# Altium PCB Beacon_V1.PcbDoc
Units mm, origin at the board's own origin, x right, y up, seen from the top; angles counter-clockwise.
Board outline 90 x 66.86 mm, 2 copper layers (Top Layer, Bottom Layer); 39 components, 31 nets, 163 pads, 34 vias.
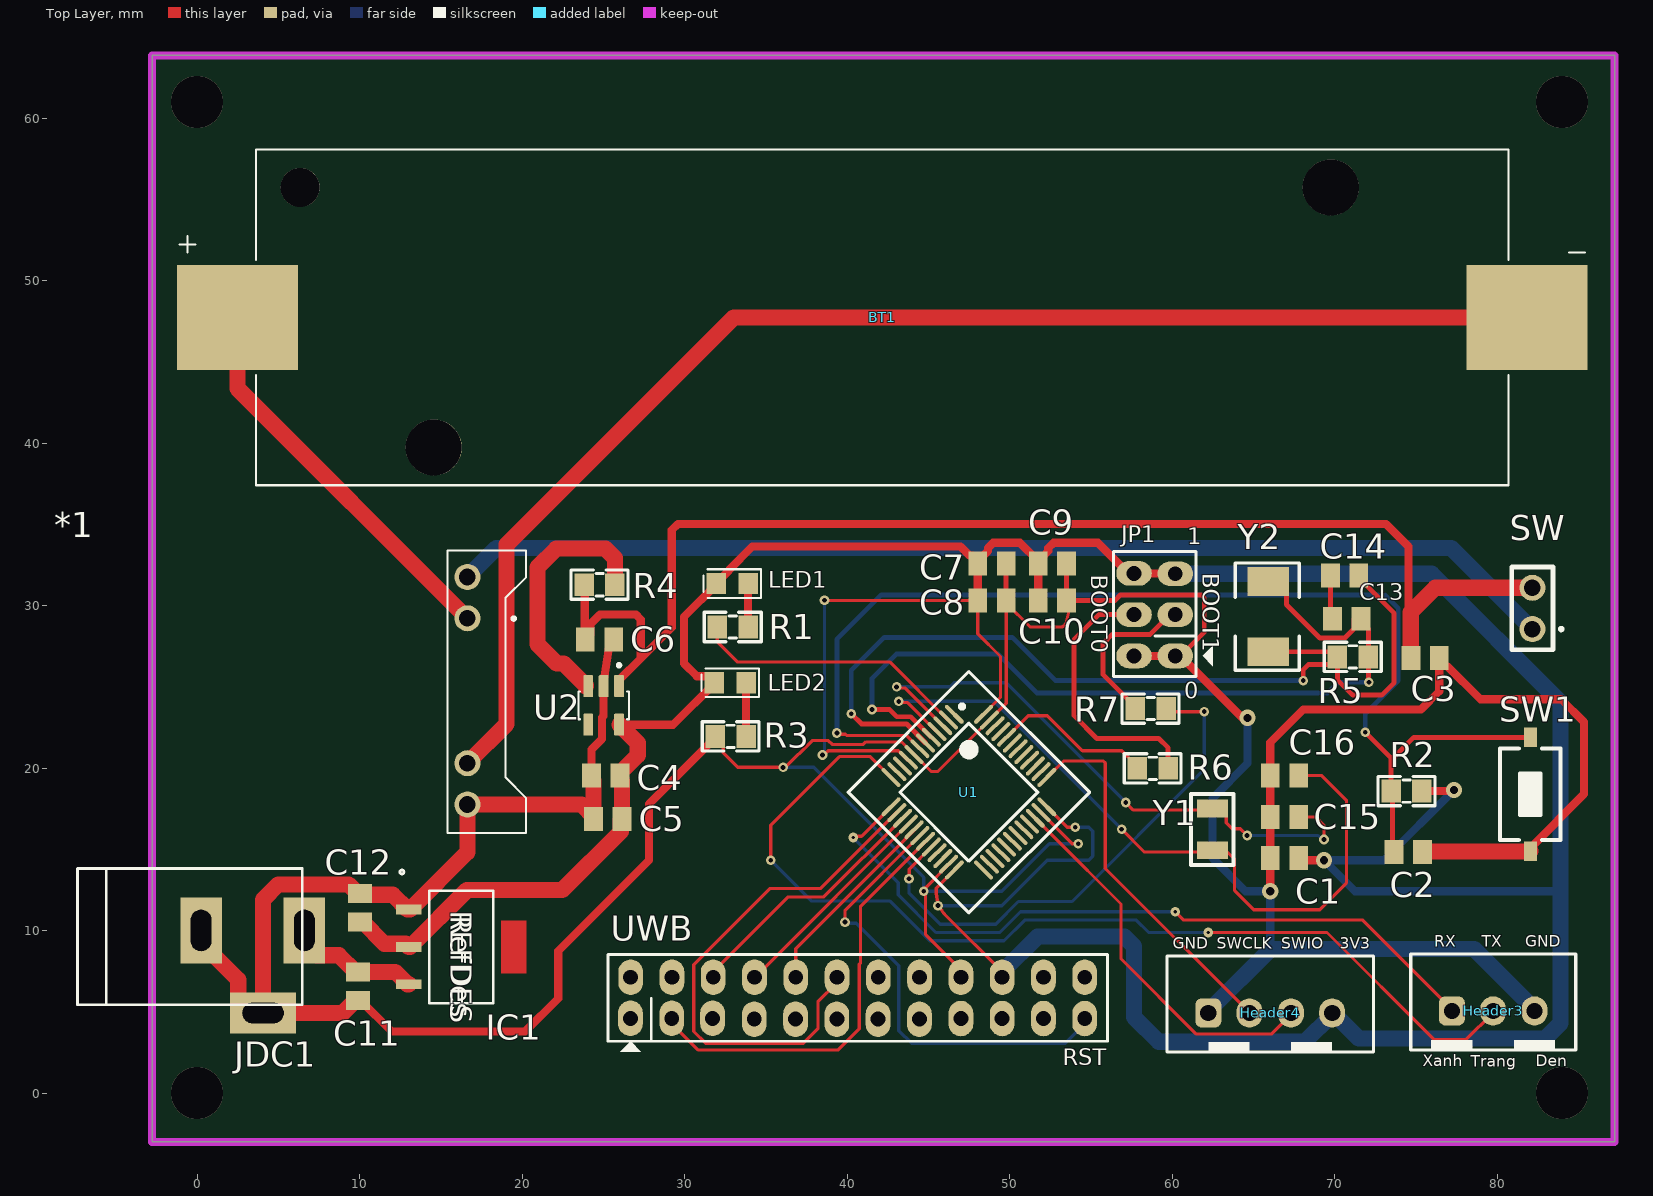
[diagram p0: Top Layer view]
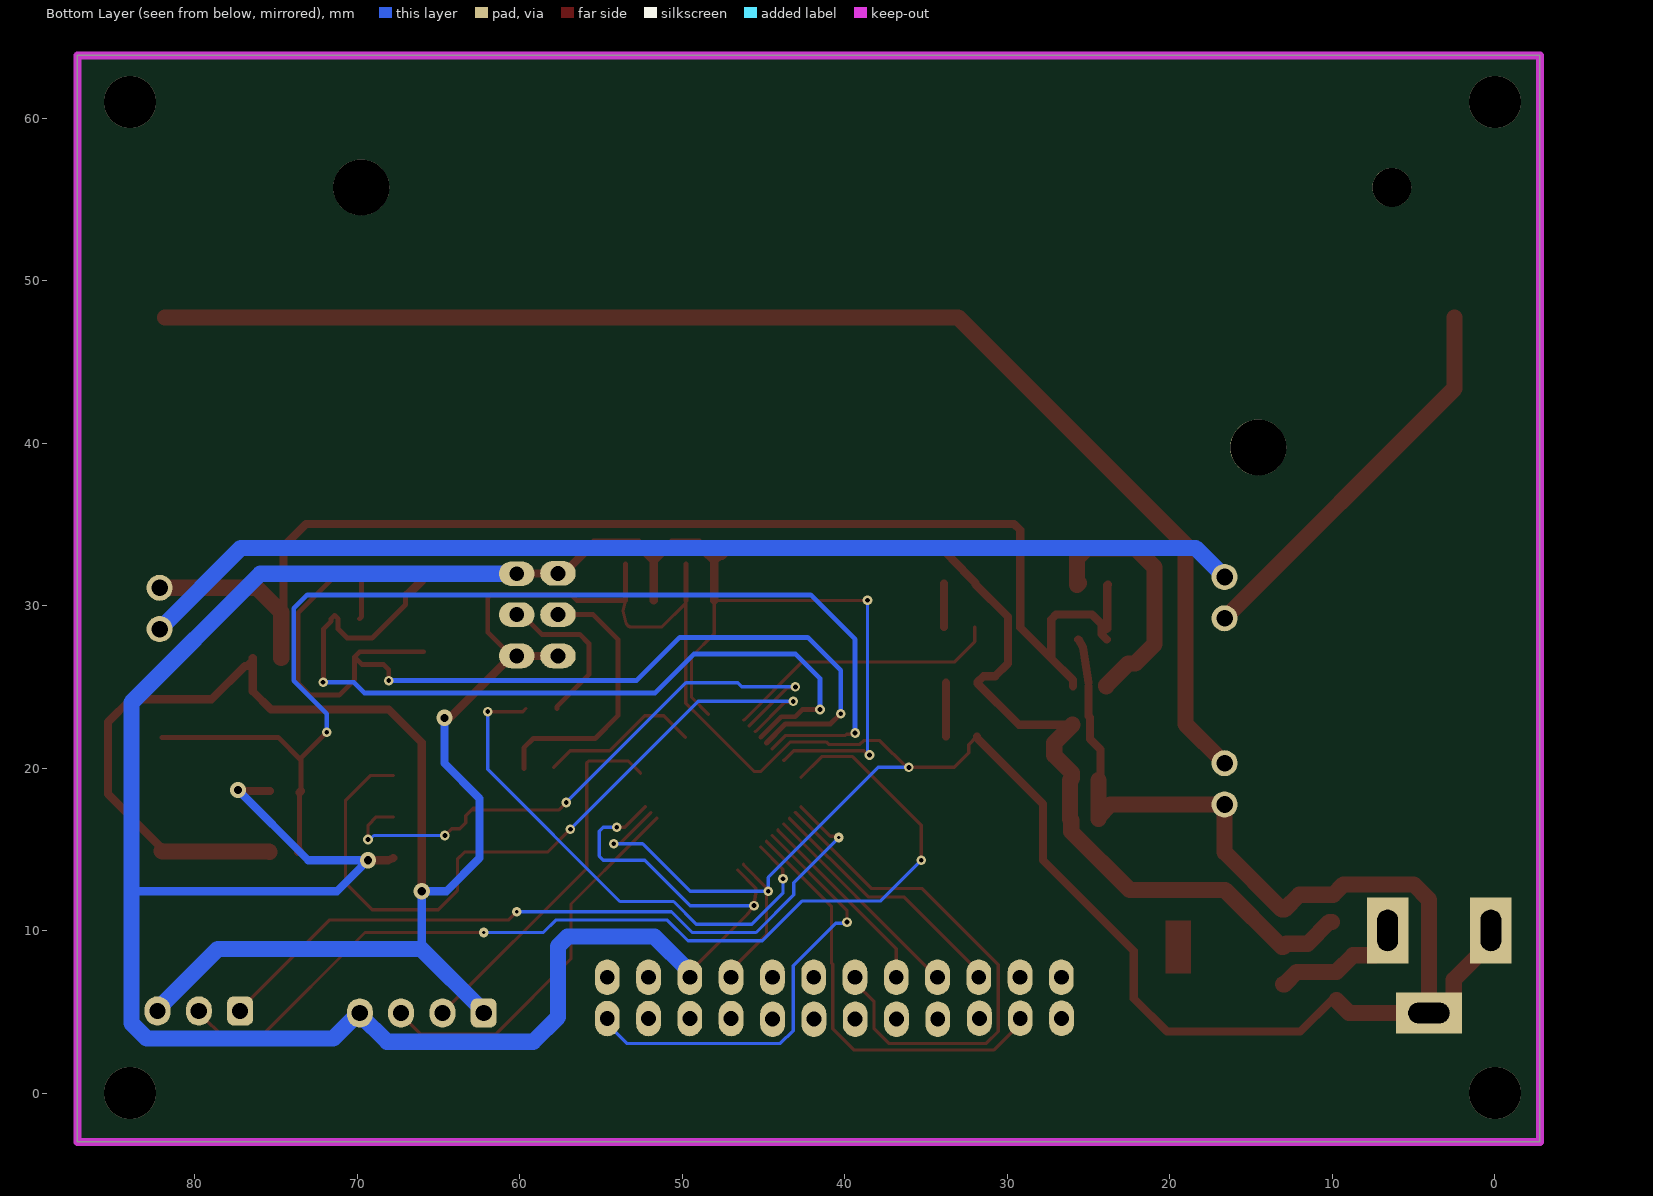
[diagram p1: Bottom Layer view, seen from below]

## Layer stack, top to bottom
Top Solder: solder mask 0.0102, Solder Resist, Dk 3.5
Top Layer: signal copper 0.0356
Dielectric 1: dielectric 0.32, FR-4, Dk 4.8
Bottom Layer: signal copper 0.0356
Bottom Solder: solder mask 0.0102, Solder Resist, Dk 3.5

## Board outline
-2.766,-3 87.234,-3 87.234,63.865 -2.766,63.865

## Design rules (kind name [scope] priority, off if disabled: settings)
Clearance [All] p1: gap=0.3 ignorepadtopadclearanceinfootprint=FALSE except(0.15: Arc-Arc Arc-Track Track-Track; 0.254: THPad-THPad Text-Text)
PolygonConnect [All] p1: connectstyle=Relief reliefconductorwidth=0.254 reliefentries=4 polygonreliefangle="90 Angle" airgapwidth=0.254
RoutingVias [All] p1: holewidth=0.5 width=1 viastyle="Through Hole" minholewidth=0.2 minwidth=0.4 maxholewidth=0.3 maxwidth=0.6
SolderMaskExpansion [All] p1: expansion=0.102 istentingtop=FALSE
Width [All] p1 off: maxlimit=0.5 minlimit=0.2 preferedwidth=0.3
30 further rules are at their usual default settings.

## Components (designator, comment, footprint, x,y, rotation, side; value= is the part's Value field where it differs from the comment)
*1 "TP4056_charger" TP4056_charger 5.137,24.764 r0 top
BT1 "1042P" BAT_1042P 42.164,47.736 r180 top
C1 "10uF" Capacitor_0805 66.915,14.462 r180 top
C2 "0.1uF" Capacitor_0805 74.535,14.843 r0 top
C3 "0.1uF" Capacitor_0805 75.565,26.781 r0 top
C4 "47uF" Capacitor_0805 25.146,19.542 r180 top
C5 "0.1uF" Capacitor_0805 25.273,16.875 r180 top
C6 "0.1uF" Capacitor_0805 24.765,27.924 r0 top
C7 "0.1uF" Capacitor_0805 48.915,32.583 r0 top
C8 "0.1uF" Capacitor_0805 48.915,30.313 r0 top
C9 "0.1uF" Capacitor_0805 52.636,32.583 r0 top
C10 "0.1uF" Capacitor_0805 52.636,30.313 r0 top
C11 "10uF" Capacitor_0805 9.906,6.588 r270 top
C12 "10uF" Capacitor_0805 10.033,11.414 r90 top
C13 "20pF" Capacitor_0805 70.739,29.194 r0 top
C14 "20pF" Capacitor_0805 70.612,31.861 r0 top
C15 "20pF" Capacitor_0805 66.915,17.002 r0 top
C16 "20pF" Capacitor_0805 66.915,19.542 r0 top
Header3 "Uart" HDR/Header/3/BOX 79.756,5.064 r90 top (schematic designator P2)
Header4 "SWD" HDR/Header/4/BOX 66.04,4.937 r0 top (schematic designator P1)
IC1 "NCP1117ST33T3G" SOT223-3_ONS 16.256,9.001 r270 top
JDC1 "Jac DC" DC-IN 3.429,7.477 r0 top
JP1 "Connector 3x2" JP3x2 58.928,29.448 r90 top
LED1 "Led" "Led 0805 Blue" 32.934,31.353 r0 top
LED2 "Led" "Led 0805 Blue" 32.807,25.257 r0 top
R1 "1k" "tro smd 0805" 32.963,28.625 r180 top
R2 "10k" "tro smd 0805" 74.422,18.653 r0 top
R3 "1k" "tro smd 0805" 32.836,21.894 r180 top
R4 "1k" "tro smd 0805" 24.765,31.353 r0 top
R5 "1M" "tro smd 0805" 71.12,26.908 r0 top
R6 "10k" "tro smd 0805" 58.801,20.05 r0 top
R7 "10k" "tro smd 0805" 58.674,23.733 r0 top
SW "JP_1x2" JP_1x2 82.169,29.829 r90 top (schematic designator jp_1)
SW1 "SW2" SW1-SMD 82.042,18.399 r90 top value="SW chip 2 pin"
U1 "STM32F103C8T6" LQFP48 47.498,18.526 r225 top
U2 "AP2112K-3.3TRG1" SOT95P285X140-5N 25.019,23.86 r270 top
UWB "Connector 12x2" JP12X2_1 26.683,4.594 r0 top (schematic designator JP2)
Y1 "ABS07" ABS07 62.484,16.24 r90 top (schematic designator 1)
Y2 "8Mhz" "Thach Anh 2 chan SMD5032" 65.913,29.321 r90 top value=4Mhz (schematic designator Y1)

## Footprints (in the part's own frame and the unit in brackets; to place one, negate y for a bottom-side part, rotate by r counter-clockwise, add the part's x,y. Pads: shape width x height; smd on the part's side, far side on the other; paste and mask are expansions set on the pad)
ABS07 [mm] "HC-49US XTAL"
  rect 1.1x1.9 smd: 1(-1.29,0) 2(1.29,0)
  silkscreen extent -2.19,-1.3 2.18,1.31, body extent -1.6,-0.75 1.6,0.75, height 0.9
BAT_1042P [mm]
  rect 7.46x6.47 smd: N(-39.67,0) P(39.67,0)
  round 3.45 hole 3.45 unplated: ""(-27.6,-8) ""(27.6,8)
  round 2.39 hole 2.39 unplated: ""(35.82,-8)
  silkscreen extent -43.25,-10.32 43.25,10.32, body extent -43,-9.94 43,10.71, height 14.86
Capacitor_0805 [mm]
  rect 1.16x1.47 smd: 1(-0.875,0) 2(0.875,0)
  body extent -1,-0.6 1,0.6, height 1.2
DC-IN [mil] "Jac DC input"
  rect 100x160 hole 50 slot 100 at 90 deg: 1(125,100) 2(-125,100)
  rect 160x100 hole 50 slot 100 at 0 deg: 3(25,-100)
  silkscreen extent -425,-80 120,250, body extent -410,-105 134,269, height 434
HDR/Header/3/BOX [mm]
  rrect50% 1.8x1.6 hole 1: 1(0,2.54)
  oval 1.8x1.6 hole 1: 2(0,0) 3(0,-2.54)
  silkscreen extent -2.41,-5.08 3.5,5.08, body extent -2.29,-5 3.41,5, height 7
HDR/Header/4/BOX [mm]
  rrect50% 1.6x1.8 hole 1: 1(-3.81,0)
  oval 1.6x1.8 hole 1: 2(-1.27,0) 3(1.27,0) 4(3.81,0)
  silkscreen extent -6.35,-2.41 6.35,3.5, body extent -6.25,-2.3 6.25,3.4, height 7
JP3x2 [mil] "Connector 3x2"
  oval 60x86 hole 36: 1(-100,-50) 2(0,-50) 3(99,-50) 4(-100,50) 5(0,50) 6(100,50)
  silkscreen extent -150,-141 153,100, body extent -150,-100 150,100, height 335
JP12X2_1 [mil]
  oval 60x86 hole 36: 1(-0.5,0.5) 2(99.5,0.5) 3(198.5,0.5) 4(299.5,-1.5) 5(399.5,-1.5) 6(499.5,-1.5) 7(599.5,-1.5) 8(699.5,-1.5) 9(800,0) 10(900,0) 11(1000,0) 12(1100,0) 13(0,100) 14(100,100) 15(200,100) 16(300,100) 17(400,100) 18(500,100) 19(600,100) 20(700,100) 21(800,100) 22(900,100) 23(1000,100) 24(1100,100)
  silkscreen extent -55,-80 1155,155, body extent -55,-47 1155,150, height 366
JP_1x2 [mm] "CWF2 (DS1069-1x2)"
  round 1.6 hole 1.02 mask+0.1: 1(-1.27,0) 2(1.27,0)
  silkscreen extent -2.54,-1.88 2.54,1.27, body extent -3.77,-2.2 3.73,3.55, height 7
"Led 0805 Blue" [mm]
  rect 1.2x1.3 smd: 1(-0.975,0) 2(0.975,0)
  silkscreen extent -1.78,-0.89 1.78,0.89, body extent -1.01,-0.62 1.01,0.63, height 1.1
LQFP48 [mm]
  oval 0.25x1.55 smd: 1(-2.75,-4.025) 2(-2.25,-4.025) 3(-1.75,-4.025) 4(-1.25,-4.025) 5(-0.75,-4.025) 6(-0.25,-4.025) 7(0.25,-4.025) 8(0.75,-4.025) 9(1.25,-4.025) 10(1.75,-4.025) 11(2.25,-4.025) 12(2.75,-4.025) 25(2.75,4.025) 26(2.25,4.025) 27(1.75,4.025) 28(1.25,4.025) 29(0.75,4.025) 30(0.25,4.025) 31(-0.25,4.025) 32(-0.75,4.025) 33(-1.25,4.025) 34(-1.75,4.025) 35(-2.25,4.025) 36(-2.75,4.025)
  oval 1.55x0.25 smd: 13(4.025,-2.75) 14(4.025,-2.25) 15(4.025,-1.75) 16(4.025,-1.25) 17(4.025,-0.75) 18(4.025,-0.25) 19(4.025,0.25) 20(4.025,0.75) 21(4.025,1.25) 22(4.025,1.75) 23(4.025,2.25) 24(4.025,2.75) 37(-4.025,2.75) 38(-4.025,2.25) 39(-4.025,1.75) 40(-4.025,1.25) 41(-4.025,0.75) 42(-4.025,0.25) 43(-4.025,-0.25) 44(-4.025,-0.75) 45(-4.025,-1.25) 46(-4.025,-1.75) 47(-4.025,-2.25) 48(-4.025,-2.75)
  silkscreen extent -5.25,-5.25 5.25,5.25, body extent -4.5,-4.5 4.5,4.5, height 1.5
SOT95P285X140-5N [mm]
  rrect15% 1.35x0.6 smd: 1(-1.185,0.95) 2(-1.185,0) 3(-1.185,-0.95) 4(1.185,-0.95) 5(1.185,0.95)
  silkscreen extent -2.57,-1.55 0.85,1.55, body extent -1.5,-1.4 1.5,1.4, height 1.4
SOT223-3_ONS [mil]
  rect 24x61 smd paste+0 mask+0: 1(-90.5,-127) 2(0,-127) 3(90.5,-127)
  Top Layer region: 64,96.5 64,157.5 -64,157.5 -64,96.5
  silkscreen extent -186,-148 137,78, body extent -131,-144 131,144, height 68
SW1-SMD [mm]
  rect 1.2x0.8 smd: 1(-3.5,0) 2(3.5,0)
  silkscreen extent -2.82,-1.85 2.82,1.85, body extent -3.05,-1.85 3.05,1.85, height 2.5
"Thach Anh 2 chan SMD5032" [mil]
  rect 70x100 smd: 1(-85,0) 2(85,0)
  silkscreen extent -130,-75 130,80, body extent -98,-63 98,63, height 51
TP4056_charger [mm]
  round 1.6 hole 1.02 mask+0.1: 1(11.5,4.46) 2(11.5,-4.46) 3(11.5,7) 4(11.5,-7)
  silkscreen extent 10.29,-8.76 15.11,8.64, body extent -14.19,-8.76 15.11,8.64, height 9.34
"tro smd 0805" [mm]
  rect 1.2x1.4 smd: 1(-0.946,-0.061) 2(0.954,-0.061)
  silkscreen extent -1.75,-0.97 1.75,0.84, body extent -1.56,-0.76 1.44,0.64, height 0.53

## Part data
BT1: "SMT Polarized Battery Holder for 18650 Battery", Package=None, Check_prices=https://www.snapeda.com/parts/1042P/Keystone/view-part/?ref=eda, MF="Keystone Electronics", MP=1042P, SnapEDA_Link=https://www.snapeda.com/parts/1042P/Keystone/view-part/?ref=snap
C1 C2 C3 C4 C5 C6 C7 C8 C9 C10 C11 C12 C13 C14 C15 C16: library part Capacitor_0805, "Capacitor; Ceramic; Cap; .220uF; Tol 10%; SMT; Vol-Rtg 50V; X7R; Tape And Reel"
Header3: library part "Header 3", "Header, 3-Pin"
Header4: library part "Header 4_1", "Header, 4-Pin"
IC1: "SOT223"
JDC1: library part DCIN, "Jac DC input"
JP1: library part JP3x2
LED1 LED2: "Typical LED"
R1 R3 R4: library part "Tro 0805 1% 1k", "Dán", Chung_Loai=Dán, Don_Vi=Con, Ma_Hang=MH005468, So_Chan=2, Ten_Linh_Kien="Trở 0805 1% 1k"
R2 R6 R7: library part "Tro 0805 1% 10k", "Dán", Chung_Loai=Dán, Don_Vi=Con, Ma_Hang=MH005473, So_Chan=2, Ten_Linh_Kien="Trở 0805 1% 10k"
R5: library part "Tro 0805 1% 1M", "Dán", Chung_Loai=Dán, Don_Vi=Con, Ma_Hang=MH005469, So_Chan=2, Ten_Linh_Kien="Trở 0805 1% 1M"
SW1: "Switch button 2 pin"
U1: "STM32 ARM-based 32-bit MCU with ARM 32-bit Cortex-M3 Microcontroller, 128 Kbytes Flash, 48-pin LQFP, Industrial Temperature", ComponentLink1Description="Manufacturer Link", ComponentLink1URL=www.st.com/stm32, ComponentLink2Description=Datasheet, ComponentLink2URL=http://www.st.com/stonline/products/literature/ds/13586.pdf, DatasheetVersion="rev6, Mar-2008", PackageDescription="48-Pin Low-Profile Quad Flat Pack, 7 x 7 mm Body, 0.5 mm Pitch (LQFP48)", PackageReference=LQFP48, PackageVersion=Mar-2008, Published=30-May-2008, Publisher="Altium Limited"
U2: "Linear Voltage Regulator IC Positive Fixed 1 Output 600mA SOT-25", Package="SOT-753 Diodes Inc.", Availability="In Stock", Check_prices=https://www.snapeda.com/parts/AP2112K-3.3TRG1/Diodes+Inc./view-part/?ref=eda, MF="Diodes Inc.", MP=AP2112K-3.3TRG1, Price=None, Purchase-URL=https://pricing.snapeda.com/search/part/AP2112K-3.3TRG1/?ref=eda, SnapEDA_Link=https://www.snapeda.com/parts/AP2112K-3.3TRG1/Diodes+Inc./view-part/?ref=snap
UWB: library part JP12x2
Y1: "SMD Quartz Crystal", Created by="Zion Blue", Published="28 April 2014", Publisher="Cynetik Group"
Y2: library part "Thach Anh 2 chan SMD 5032", "Crystal For all Crystal 2pin."

## Via types
v1: diameter 0.6, hole 0.3, Top Layer to Bottom Layer, 23 vias
v2: diameter 3.2, hole 3.2, Top Layer to Bottom Layer, 4 vias
v3: diameter 1, hole 0.5, Top Layer to Bottom Layer, 4 vias
v4: diameter 0.6, hole 0.2, Top Layer to Bottom Layer, 3 vias

## Nets (pads, with @x,y where several pads share a name; then routed paths per layer and width w, separated by ;. In a path a pad name is that pad's centre, name@x,y a point inside that pad or via, vN(x,y) a via of type N, cw(c..) or ccw(c..) an arc to the next point about the centre after c; other vN are vias at no path point)
3V3: C1.1 C4.1 C5.1 C7.1 C8.1 C9.1 C10.1 C12.1 Header4.4 IC1.2 JP1.3 JP1.6 LED1.1 LED2.1 R2.2 U1.9 U1.24 U1.36 U1.48 U2.5 UWB.22 | length 254.3
  Top Layer w0.2: v1(38.481,20.812) 38.589,20.812 38.843,21.066 43.155,21.066 43.733,20.488 U1.9 ; v1(38.608,30.337) 38.632,30.313 C8.1 48.04,28.271 49.44,26.871 49.44,24.357 U1.48 ; U1.24 45.484,12.623 45.484,12.536 45.492,12.307 ccw(c47.579,12.381) 46.105,10.902 49.543,7.464 UWB.22 ; U1.36 53.546,16.367 v1(54.037,16.367)
  Top Layer w0.5: U2.5 25.994,22.675 29.3,22.675 31.832,25.207 LED2.1 31.832,25.307 31.482,25.657 30.754,25.657 29.972,26.439 29.972,29.316 31.959,31.303 LED1.1 31.959,31.403 32.728,32.172 32.728,32.199 34.167,33.639 46.984,33.639 47.555,33.068 47.71,33.068 C7.1@48.04,32.738 ; C8.1 C7.1 C7.1@48.04,32.738 ; C10.1 C9.1 C9.1@51.761,32.738 ; JP1.3 60.185,31.975 57.671,31.975 JP1.6 57.328,31.988 55.448,33.868 52.703,33.868 52.381,33.546 52.381,33.358 C9.1@51.761,32.738 ; C1.1 68.12,14.335 v3(69.342,14.335) ; R2.2 77.282,18.592 v3(77.343,18.653) ; C7.1@48.04,32.738 48.66,33.358 48.66,33.546 48.983,33.868 50.631,33.868 C9.1@51.761,32.738
  Top Layer w1: C12.1 10.188,10.539 11.531,9.196 12.835,9.196 IC1.2 13.11,9.001 16.611,12.502 22.472,12.502 26.068,16.099 26.068,16.795 C5.1 26.148,19.26 26.021,19.387 C4.1 26.021,19.697 27.124,20.8 27.124,21.545 U2.5@25.994,22.675
  Bottom Layer w0.2: v1(38.481,20.812) 38.608,20.939 v1(38.608,30.337) ; v1(45.593,11.541) 49.53,11.541 52.324,14.335 54.864,14.335 55.118,14.589 55.118,16.123 54.874,16.367 v1(54.037,16.367)
  Bottom Layer w0.5: v3(77.343,18.653) 73.025,14.335 v3(69.342,14.335) 71.247,12.43 83.896,12.43
  Bottom Layer w1: UWB.22 49.543,7.464 51.714,9.636 57.072,9.636 57.658,9.05 57.658,4.683 59.182,3.159 68.172,3.159 69.85,4.837 Header4.4 69.912,4.937 71.485,3.364 82.959,3.364 83.896,4.301 83.896,12.43 83.896,24.038 75.971,31.963 JP1.3
BOOT0: R6.1 U1.44 | length 10
  Top Layer w0.2: U1.44 51.136,23.225 52.324,23.225 54.483,21.066 56.896,21.066 R6.1@57.914,20.048
BOOT1: R7.2 U1.20 | length 32
  Top Layer w0.2: v1(43.816,13.192) 43.825,13.201 43.825,13.792 U1.20 ; R7.2 59.822,23.479 v1@61.722,23.479
  Bottom Layer w0.2: v1(43.816,13.192) 43.816,12.302 45.72,10.398 49.149,10.398 50.546,11.795 53.848,11.795 61.976,19.923 v1(61.976,23.479)
DC_IN: C11.1 IC1.3 JDC1.1 | length 8.2
  Top Layer w1: JDC1.1 6.604,9.255 7.374,8.485 8.729,8.485 9.751,7.463 C11.1 12.19,7.463 12.951,6.702 IC1.3
DW_IRQ: U1.19 UWB.2 | length 26.3
  Top Layer w0.2: UWB.2 29.21,4.277 30.823,2.664 39.451,2.664 40.748,3.96 40.748,7.933 40.832,8.017 40.832,11.506 U1.19
DW_NSS: U1.14 UWB.18 | length 32.5
  Top Layer w0.2: UWB.18 39.383,6.804 38.208,5.629 38.208,3.96 37.311,3.064 31.294,3.064 30.563,3.795 30.563,7.908 35.244,12.589 38.344,12.589 43.026,17.271 U1.14
DW_RESET: U1.18 UWB.12 | length 28.6
  Top Layer w0.2: v1(39.878,10.525) 39.878,11.26 U1.18 ; UWB.12@54.623,4.264 UWB.12
  Bottom Layer w0.2: v1(39.878,10.525) 39.951,10.452 40.578,10.452 43.186,7.844 43.186,3.846 43.969,3.064 53.423,3.064 54.623,4.264 UWB.12
GND: *1.4 C1.2 C2.2 C3.2 C4.2 C5.2 C6.2 C7.2 C8.2 C9.2 C10.2 C11.2 C12.2 C15.1 C16.1 Header3.3 Header4.1 IC1.1 JDC1.2 JDC1.3 JP1.1 JP1.4 R3.2 SW1.1 U1.8 U1.23 U1.35 U1.47 U2.2 UWB.21 | length 276.8
  Top Layer w0.2: R3.2 32.382,21.455 32.382,20.942 33.274,20.05 v1(36.068,20.05) 36.195,20.05 37.846,21.701 38.844,21.701 39.08,21.464 41.008,21.464 41.159,21.615 43.348,21.615 U1.8 45.167,19.796 45.586,19.796 U1.47 49.79,24 C8.2@49.79,30.158 ; v1(44.721,12.425) v1@44.831,12.425 ; U1.23 46.243,14.054 44.831,12.642 v1@44.831,12.425 ; UWB.21 47.003,7.591 44.831,9.763 v1@44.831,12.425 ; C8.2 C8.2@49.79,30.158 ; U1.35 53.855,15.351 v1@53.975,15.351 ; C10.2 53.659,29.678 53.467,28.941 cw(c53.135,29.031) 53.135,28.686 51.262,28.686 C8.2@49.79,30.158
  Top Layer w0.3: C8.2 C7.2 ; C9.2 C10.2 56.478,30.313 56.826,30.66 61.8,30.66 61.976,30.484 61.976,28.356 JP1.1@60.528,26.908
  Top Layer w0.5: C11.2@9.751,5.713 C11.2 10.061,5.713 11.98,3.794 20.193,3.794 22.225,5.826 22.225,8.747 27.813,14.335 27.813,17.786 31.882,21.855 R3.2 ; C4.2@24.398,19.26 24.271,19.387 C4.2 24.271,21.151 24.919,21.799 24.919,23.11 25.019,23.21 U2.2 ; U2.2@25.019,25.26 25.051,25.47 25.348,27.439 C6.2 ; JP1.4 JP1.1 60.528,26.908 64.338,23.098 v3(64.643,23.098) ; v3(66.04,12.43) C1.2 C15.1 C16.1 66.04,21.574 68.072,23.606 75.311,23.606 76.44,24.735 C3.2@76.44,26.626 ; C3.2 C3.2@76.44,26.626 ; SW1.1 82.042,15.099 85.344,18.401 85.344,22.844 83.947,24.241 78.98,24.241 76.925,26.296 76.77,26.296 C3.2@76.44,26.626
  Top Layer w1: JDC1.2 0.254,9.255 2.532,6.977 2.532,5.707 3.302,4.937 JDC1.3 ; C11.2@9.751,5.713 8.975,4.937 JDC1.3 ; C5.2 C5.2@24.398,17.03 ; C4.2@24.398,19.26 C5.2@24.398,17.03 ; C2.2 75.438,14.871 82.014,14.871 SW1.1 ; JDC1.3 4.064,11.91 5.003,12.849 9.318,12.849 9.958,12.209 12.041,12.209 12.951,11.3 IC1.1 13.11,11.3 16.637,14.827 *1.4 23.664,17.764 C5.2@24.398,17.03
  Bottom Layer w0.2: v1(36.068,20.05) 37.949,20.05 44.721,13.278 v1(44.721,12.425) 49.525,12.425 52.451,15.351 v1(54.229,15.351)
  Bottom Layer w0.5: v3(64.643,23.098) 64.643,20.304 62.484,18.145 62.484,14.462 64.516,12.43 v3(66.04,12.43) 66.04,8.901 66.067,8.874
  Bottom Layer w1: Header4.1 62.23,5.037 66.067,8.874 78.586,8.874 82.296,5.164 Header3.3
MISO: U1.16 UWB.16 | length 13.4
  Top Layer w0.2: UWB.16 34.886,7.718 34.922,7.718 U1.16
MOSI: U1.17 UWB.17 | length 12.1
  Top Layer w0.2: UWB.17 36.843,8.896 44.122,16.175 U1.17
Net*1_3: *1.3 SW.1 | length 68.3
  Bottom Layer w1: *1.3 18.423,33.55 77.178,33.55 SW.1
NetC13_1: C13.1 C14.1 | length 2.7
  Top Layer w0.3: C14.1 69.737,29.321 C13.1
NetJP1_2: JP1.2 R7.1 | length 10.3
  Top Layer w0.3: R7.1 57.728,23.772 55.753,25.748 55.753,27.67 56.319,28.236 58.656,28.236 59.868,29.448 JP1.2
  Top Layer w0.5: JP1.2 JP1.2@60.528,29.448
NetJP1_5: JP1.5 R6.2 | length 16.9
  Top Layer w0.3: JP1.5 55.499,29.448 53.975,27.924 53.975,23.225 55.372,21.828 59.182,21.828 59.755,21.255 R6.2
NetLED1_2: LED1.2 R1.1 | length 2.7
  Top Layer w0.5: R1.1 LED1.2
NetLED2_2: LED2.2 R3.1 | length 3.3
  Top Layer w0.5: R3.1 LED2.2
NetR4_2: R4.2 U2.3 | length 16.1
  Top Layer w1: U2.3@23.919,25.045 23.919,25.087 22.567,26.439 22.137,26.439 20.955,27.621 20.955,32.369 22.098,33.512 25.134,33.512 25.719,32.926 R4.2 R4.2@25.619,31.392
OSCIN: C13.2 R5.2 U1.5 Y2.2 | length 52.5
  Top Layer w0.3: v1(41.529,23.606) 42.626,23.606 43.065,23.167 43.918,23.167 U1.5 ; Y2.2@66.652,30.741 Y2.2 66.294,31.48 67.033,30.741 67.033,30.074 69.098,28.009 70.63,28.009 71.184,28.563 71.184,29.194 71.399,29.409 C13.2 71.614,29.039 72.074,28.579 R5.2 72.074,25.319 v1@72.136,25.257
  Bottom Layer w0.3: v1(41.529,23.606) 41.529,25.511 43.053,27.035 49.276,27.035 51.677,24.634 69.566,24.634 70.22,25.288 v1(72.105,25.288)
OSCOUT: C14.2 R5.1 U1.6 Y2.1 | length 58.3
  Top Layer w0.3: v1(40.259,23.352) 40.894,22.717 43.661,22.717 U1.6 ; Y2.1 69.86,27.162 R5.1 R5.1@70.174,26.838 ; v1(68.072,25.384) 68.072,26.064 68.396,26.388 69.724,26.388 R5.1@70.174,26.838 ; C14.2 71.487,31.706 73.66,29.533 73.66,25.257 72.898,24.495 71.12,24.495 70.174,25.441 R5.1@70.174,26.838
  Bottom Layer w0.3: v1(40.259,23.352) 40.259,26.019 42.291,28.051 50.165,28.051 52.832,25.384 v1(68.072,25.384)
PC13: R1.2 U1.2 | length 17.1
  Top Layer w0.2: R1.2 32.009,27.792 33.274,26.527 42.644,26.527 46.208,22.963 U1.2
PC14: C15.2 U1.3 Y1.2 | length 37.7
  Top Layer w0.2: v1(43.053,25.003) 43.13,24.926 43.572,24.926 U1.3 ; v1(57.15,17.891) 57.618,17.423 Y1.2@62.992,17.423 ; Y1.2 62.884,17.53 63.334,17.08 63.334,16.64 63.704,16.27 64.206,16.27 v1(64.617,15.859) ; C15.2 68.834,17.002 69.342,16.494 v1(69.342,15.605)
  Bottom Layer w0.2: v1(43.053,25.003) 46.346,25.003 46.6,25.257 49.784,25.257 v1(57.15,17.891) ; v1(64.617,15.859) 68.98,15.859 69.234,15.605 v1(69.342,15.605)
PC15: C16.2 U1.4 Y1.1 | length 46.2
  Top Layer w0.2: v1(43.18,24.112) 43.257,24.036 43.721,24.036 45.5,22.256 U1.4 ; v1(56.896,16.24) 58.293,14.843 62.992,14.843 63.392,14.843 63.842,14.393 63.842,12.469 65.024,11.287 69.088,11.287 70.73,12.929 70.73,18.027 69.215,19.542 C16.2
  Bottom Layer w0.2: v1@43.434,24.114 49.022,24.114 v1(56.896,16.24)
RESET: C2.1 R2.1 SW1.2 U1.7 | length 73
  Top Layer w0.2: v1(39.37,22.164) 39.447,22.088 39.898,22.088 39.969,22.017 43.653,22.017 U1.7
  Top Layer w0.3: v1(71.882,22.209) 73.476,20.615 73.476,20.501 ; R2.1 73.476,20.501 ; C2.1@73.568,14.935 R2.1@73.568,18.5 ; SW1.2 74.874,21.899 73.476,20.501
  Top Layer w0.5: R2.1 R2.1@73.568,18.5 ; C2.1@73.568,14.935 C2.1
  Bottom Layer w0.3: v1(39.37,22.164) 39.37,27.924 42.106,30.66 73.083,30.66 73.914,29.829 73.914,25.384 71.882,23.352 v1(71.882,22.209)
RX: Header3.1 U1.13 | length 45.9
  Top Layer w0.2: v4(40.386,15.732) 40.463,15.809 40.891,15.809 U1.13 ; v4(60.198,11.16) 60.706,10.652 71.728,10.652 77.216,5.164 Header3.1
  Bottom Layer w0.2: v4(40.386,15.732) 43.155,12.963 43.155,12.201 45.466,9.89 49.403,9.89 50.673,11.16 v4(60.198,11.16)
SCK: U1.15 UWB.15 | length 15.9
  Top Layer w0.2: UWB.15 31.763,7.464 36.378,12.08 38.577,12.08 U1.15
SWCLK: Header4.2 U1.37 | length 22.7
  Top Layer w0.2: U1.37@52.572,19.675 53.337,20.441 55.763,20.441 55.88,20.324 55.88,13.827 Header4.2
SWIO: Header4.3 U1.34 | length 23.9
  Top Layer w0.2: U1.34 52.799,15.699 56.856,11.643 56.856,8.28 61.499,3.637 66.11,3.637 67.31,4.837 Header4.3
  Top Layer w1: Header4.3@67.437,4.837 Header4.3@67.437,4.937
TX: Header3.2 U1.12 | length 62.7
  Top Layer w0.2: v1(35.306,14.335) 35.306,16.494 39.528,20.716 41.419,20.716 U1.12 ; v4(62.23,9.89) 69.531,9.89 76.135,3.286 78.078,3.286 79.756,4.964 Header3.2
  Bottom Layer w0.2: v1(35.306,14.335) 37.821,11.82 42.647,11.82 45.085,9.382 49.657,9.382 50.927,10.652 57.794,10.652 58.556,9.89 v4(62.23,9.89)
VBAT+: *1.1 BT1.P | length 24.4
  Top Layer w1: BT1.P 2.494,43.367 *1.1
VBAT-: *1.2 BT1.N | length 83
  Top Layer w1: *1.2 19.05,22.717 19.05,33.766 33.02,47.736 BT1.N
VOUT: C3.1 C6.1 R4.1 SW.2 U2.1 | length 84.5
  Top Layer w0.5: R4.1 23.855,31.257 23.855,28.594 C6.1@23.89,28.559 ; C6.1 24.22,28.254 24.22,28.864 24.804,29.448 27.012,29.448 27.305,29.155 27.305,26.756 ; U2.1 25.969,25.42 27.305,26.756 ; C3.1 74.549,26.922 74.549,33.639 73.152,35.036 29.591,35.036 29.21,34.655 29.21,28.661 27.305,26.756
  Top Layer w1: C3.1 74.69,29.589 76.2,31.099 SW.2
pads on no net: BT1. U1.1 U1.10 U1.11 U1.21 U1.22 U1.25 U1.26 U1.27 U1.28 U1.29 U1.30 U1.31 U1.32 U1.33 U1.38 U1.39 U1.40 U1.41 U1.42 U1.43 U1.45 U1.46 U2.4 UWB.1 UWB.3 UWB.4 UWB.5 UWB.6 UWB.7 UWB.8 UWB.9 UWB.10 UWB.11 UWB.13 UWB.14 UWB.19 UWB.20 UWB.23 UWB.24
copper on no net:
  other v2: 0,0 84,0 0,61 84,61

## Keep-outs
Keep-Out Layer:
  the board outline again, w0.5

## Silkscreen, mask and mechanical layers (free items; w line width, h text height)
Top Overlay:
  text "1" at 60.92,33.789 h1
  text "BOOT1" at 61.872,31.995 h1 r270
  text "BOOT1" at 61.872,31.995 h1 r270
  text "BOOT0" at 55.014,31.908 h1 r270
  text "0" at 60.754,24.264 h1
  text "RX" at 76.125,9.024 h0.7
  text "TX" at 79.046,9.024 h0.7
  text "GND" at 81.744,9.024 h0.7
  text "GND" at 60.027,8.897 h0.7
  text "SWCLK" at 62.756,8.897 h0.7
  text "SWIO" at 66.72,8.897 h0.7
  text "3V3" at 70.314,8.897 h0.7
  text "RST" at 53.277,1.708 h1
  text "Xanh" at 75.425,1.658 h0.7
  text "Den" at 82.379,1.658 h0.7
  text "Trang" at 78.377,1.637 h0.7

## Text inside footprints (layer, text, board x,y; h text height)
IC1: Top Overlay "REFDES" at 15.621,11.224 h1.27 r270; Top Overlay "RefDes" at 15.621,10.906 h1.27 r270; Mechanical 13 "RefDes2" at 15.621,11.224 h1.27 r270